# Altium PCB ip_phone_pcb.PcbDoc (part 4 of 4)
Units mil, origin at the board's own origin, x right, y up, seen from the top; angles counter-clockwise.
Board outline 2401.57 x 6885.83 mil, 6 copper layers (Component Side, Ground Plane, Inner Layer 1, Inner Layer 2, Power Plane, Solder Side), stack 60.4 mil thick; 371 components, 298 nets, 1249 pads, 735 vias.
Unrouted connection lines stored in the file: 81.
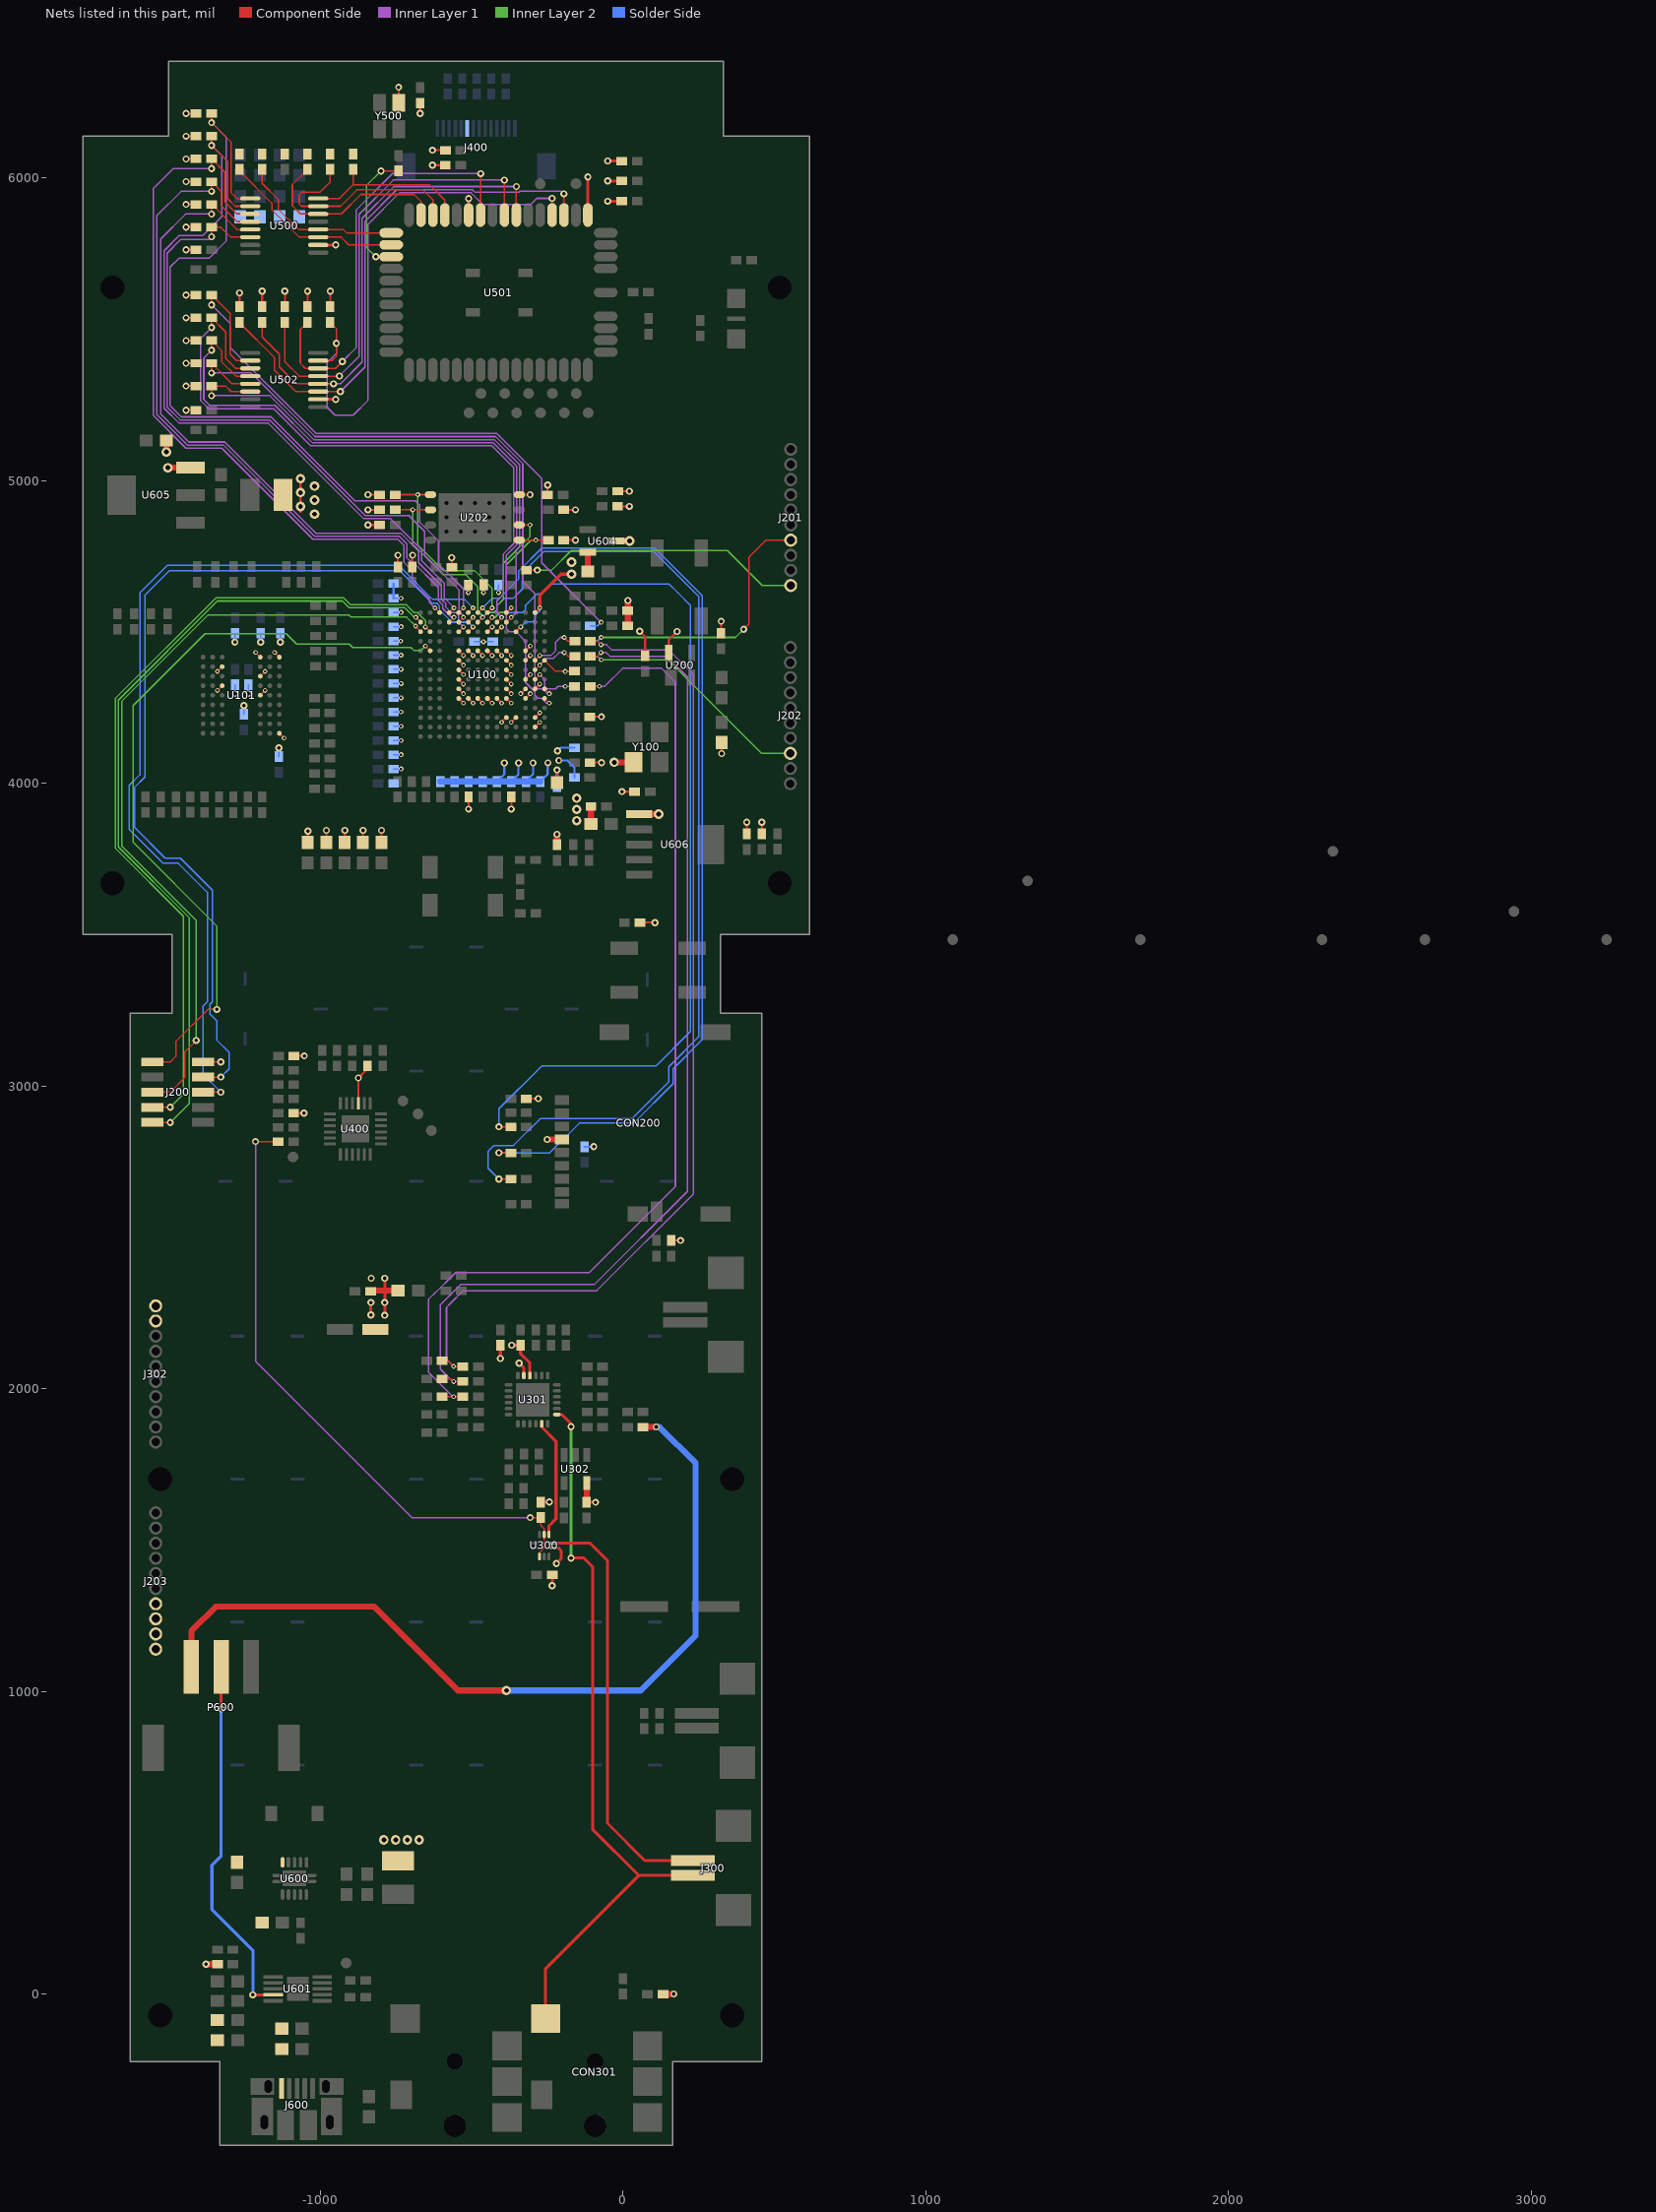
[diagram p8: the nets of this part, all layers, seen from the top]

## Via types
v1: diameter 15.75, hole 7.87, Component Side to Solder Side, tented top, 367 vias
v2: diameter 23.62, hole 11.81, Component Side to Solder Side, 261 vias
v3: diameter 23.62, hole 11.81, Component Side to Solder Side, tented bottom, 44 vias
v4: diameter 31.5, hole 15.75, Component Side to Solder Side, 28 vias
v5: diameter 25.98, hole 12.99, Component Side to Solder Side, tented top, 8 vias
v6: diameter 15.75, hole 7.87, Component Side to Solder Side, 6 vias
v7: diameter 23.62, hole 11.81, Component Side to Solder Side, tented top, 6 vias
v8: diameter 17.72, hole 11.81, Component Side to Solder Side, 5 vias
v9: diameter 19.68, hole 19.68, Component Side to Solder Side, 5 vias
v10: diameter 23.62, hole 11.81, Component Side to Solder Side, tented both sides, 4 vias
v11: diameter 31.5, hole 15.75, Component Side to Solder Side, tented bottom, 1 vias

## Nets (pads, with @x,y where several pads share a name; then routed paths per layer and width w, separated by ;. In a path a pad name is that pad's centre, name@x,y a point inside that pad or via, vN(x,y) a via of type N, cw(c..) or ccw(c..) an arc to the next point about the centre after c; other vN are vias at no path point) (continued)
SDIO1: R511.1 U500.6 U501.15 | length 658.3
  Component Side w5: R511.1@-1041.91,6028.52 -1092.03,5978.39 -1092.03,5908.39 -1065.11,5881.47 U500.6@-1006.91,5881.47 -930.53,5881.47 -866,5946 -690,5946 -667.18,5923.18 U501.15@-667.18,5878
SDIO2: R512.1 U500.7 U501.14 | length 722.3
  Component Side w5: R512.1@-966.91,6028.52 -966.91,5987.52 -1001.03,5953.39 -1061.03,5953.39 -1069.66,5944.76 -1069.66,5915.02 -1061.7,5907.06 U500.7@-1006.91,5907.06 -932.94,5907.06 -879,5961 -661,5961 -627.81,5927.81 U501.14@-627.81,5878
SDIO3: R513.1 U500.8 U501.13 | length 558.2
  Component Side w5: U500.8@-1006.91,5932.65 -936.77,5932.65 -891.91,5977.52 ; R513.1@-891.91,6028.52 -891.91,5977.52 ; U501.13@-588.44,5878 -588.44,5927.44 -638.52,5977.52 -891.91,5977.52
SDIO_0: R505.2 U100.L2 U500.12 | length 2454.7
  Component Side w5: v2(-1359.09,5956.09) R505.2@-1359.09,5988.23 -1327,5956.14 -1327,5908.86 -1274.02,5855.88 U500.12@-1231.31,5855.88 ; U100.L2@-573.99,4532.86 v1(-558.24,4548.61)
  Inner Layer 1 w5: v2(-1359.09,5956.09) -1459.91,5956.09 -1540,5876 -1540,5219 -1439,5118 -1319.79,5118 -1018.79,4817 -739,4817 -714.43,4792.43 -714.43,4746.12 -702.9,4734.59 -696.59,4734.59 -609.74,4647.74 -609.74,4604.49 -595.05,4589.8 -595.05,4577.91 -565.75,4548.61 v1(-558.24,4548.61)
SDIO_1: R504.2 U100.M1 U500.11 | length 2538.6
  Component Side w5: v2(-1359.09,6031.09) R504.2@-1359.09,6063.23 -1316,6020.14 -1316,5922 -1275.47,5881.47 U500.11@-1231.31,5881.47 ; v1(-621.24,4580.1) U100.M1@-605.49,4564.35
  Inner Layer 1 w5: v2(-1359.09,6031.09) -1485.91,6031.09 -1551,5966 -1551,5215 -1444,5108 -1325.65,5108 -1024.65,4807 -744,4807 -724.43,4787.43 -724.43,4731.43 -696.74,4703.74 -696.74,4668.26 -638.85,4610.38 -638.85,4597.72 v1(-621.24,4580.1)
SDIO_2: R503.2 U100.L1 U500.10 | length 2622.8
  Component Side w5: R503.2@-1359.09,6138.23 v2(-1359.09,6108.09) -1306,6055 -1306,5932 -1281.06,5907.06 U500.10@-1231.31,5907.06 ; U100.L1@-573.99,4564.35 v1(-558.24,4580.1)
  Inner Layer 1 w5: v2(-1359.09,6108.09) -1326,6075 -1326,5872 -1387,5811 -1465,5811 -1516,5760 -1516,5239.72 -1466.28,5190 -1171.65,5190 -856.33,4874.68 -767.68,4874.68 -665.05,4772.05 -665.05,4736.05 -589.74,4660.74 -589.74,4612.77 -558.24,4581.28 v1(-558.24,4580.1)
SDIO_3: R502.2 U100.K1 U500.9 | length 2832.1
  Component Side w5: R502.2@-1359.09,6213.23 v2(-1359.09,6183.09) -1294,6118 -1294,5950.98 -1275.67,5932.65 U500.9@-1231.31,5932.65 ; U100.K1@-542.5,4564.35 v1(-526.75,4580.1)
  Inner Layer 1 w5: v2(-1359.09,6183.09) -1310,6134 -1310,5793 -1368,5735 -1467,5735 -1496,5706 -1496,5248 -1459,5211 -1162.65,5211 -885.65,4934 -686,4934 -671,4919 -671,4863 -609,4801 -609,4725 -526.75,4642.75 v1(-526.75,4580.1)
SDIO_CLK: R507.2 U100.K2 U500.14 | length 2233
  Component Side w5: v2(-1359,5806) -1359,5838.14 R507.2@-1359.09,5838.23 -1329.23,5838.23 -1295.7,5804.7 U500.14@-1231.31,5804.7 ; U100.K2@-542.5,4532.86 v1(-526.75,4548.61)
  Inner Layer 1 w5: v2(-1359,5806) -1368,5797 -1461,5797 -1506,5752 -1506,5243.86 -1463.14,5201 -1167.65,5201 -851.33,4884.68 -705.68,4884.68 -704,4883 -704,4881.86 -655.05,4832.91 -655.05,4753.05 -542.12,4640.12 -542.12,4568.37 -526.75,4552.99 v1(-526.75,4548.61)
SDIO_CMD: R506.2 U100.K3 U500.13 | length 2357.2
  Component Side w5: v2(-1359.09,5881.09) R506.2@-1359.09,5913.23 -1276.15,5830.29 U500.13@-1231.31,5830.29 ; U100.K3@-542.5,4501.36 v1(-526.75,4517.11)
  Inner Layer 1 w5: v2(-1359.09,5881.09) -1444.91,5881.09 -1527,5799 -1527,5221 -1434,5128 -1315.65,5128 -1014.65,4827 -734.14,4827 -675.05,4767.91 -675.05,4729.05 -599.74,4653.74 -599.74,4608.63 -585.05,4593.94 -585.05,4582.05 -566.98,4563.98 -551.88,4563.98 -542.87,4554.97 -542.87,4533.23 v1(-526.75,4517.11)
SDIOCLK: R508.1 U500.3 U501.18 | length 619.6
  Component Side w5: R508.1@-1266.91,6028.52 -1266.91,6024.04 -1160.03,5917.16 -1160.03,5895.8 -1068.93,5804.7 U500.3@-1006.91,5804.7 -930.7,5804.7 -905.57,5779.57 U501.18@-765.61,5779.57
SDIOCMD: R509.1 U500.4 U501.17 | length 558.9
  Component Side w5: R509.1@-1191.91,6028.52 -1191.91,5982.27 -1139.03,5929.39 -1139.03,5897.39 -1071.93,5830.29 U500.4@-1006.91,5830.29 -924.29,5830.29 -912.94,5818.94 U501.17@-765.61,5818.94
SFS_CON: R311.1 R323.1 R331.2 | length 3410.7
  Component Side w5: R331.2@-597.45,1973.9 R323.1@-528.95,1973.9 ; R311.1@-108.74,4320.39 v1(-78.08,4320.39)
  Inner Layer 1 w5: -625.47,2311.48 -552.9,2384.06 -286.9,2384.06 ; -617.04,2321.06 -643.04,2295.06 -643.04,2055.06 -561.89,1973.9 v1(-559.61,1973.9) ; -297.04,2384.06 -111.46,2384.06 173.15,2668.67 173.15,4334.68 127.43,4380.39 -1.08,4380.39 -61.08,4320.39 v1(-78.08,4320.39)
SLOW_CLK: R525.1 U501.19 | length 426.1
  Component Side w5: v2(-816.8,5740.2) U501.19@-765.61,5740.2 ; v2(-799.48,6023.52) R525.1@-740.91,6023.52
  Inner Layer 2 w5: v2(-816.8,5740.2) -848,5771.41 -848,5975 v2(-799.48,6023.52)
SPI0_\C\S\_FLASH: R227.1 U100.G1 U202.1 | length 675.1
  Component Side w5: R227.1@-752.74,4953.99 v1(-677.83,4954) U202.1@-635.74,4953.99 ; U100.G1@-448.01,4564.35 v1(-432.26,4580.1)
  Inner Layer 2 w5: v1(-677.83,4954) -677.83,4788.14 -591.87,4702.18 -489.02,4702.18 -432.26,4645.43 v1(-432.26,4580.1)
SPI0_CLK: R231.1 U100.H1 U202.6 | length 3691.4
  Component Side w5: U100.H1@-479.5,4564.35 v1(-463.76,4580.1) ; v2(-409.76,2779.62) R231.1@-370.34,2779.62 ; U202.6@-342.43,4853.99 v1(-306.84,4854)
  Inner Layer 2 w5: v1(-463.76,4580.1) -447.65,4564 -426.62,4564 -416.89,4573.73 -416.89,4586.95 -395.39,4608.45 -395.39,4727.45 -306.84,4815.99 v1(-306.84,4854)
  Solder Side w5: v1(-463.76,4580.1) -432.73,4611.13 -408.84,4611.13 -344.33,4675.64 -344.33,4702.09 -268.59,4777.83 104.67,4777.83 261.97,4620.54 261.97,3153.39 165.82,3057.24 165.82,3008.24 35.12,2877.54 -144.03,2877.54 -241.95,2779.62 v2(-409.76,2779.62)
SPI0_MISO: R225.1 R233.1 U100.H2 U202.2 | length 4020.1
  Component Side w5: R225.1@-752.74,4903.99 U202.2@-635.74,4903.99 ; U100.H2@-479.5,4532.86 v1(-463.76,4548.61) ; v2(-409.76,2692.62) R233.1@-370.34,2692.62
  Inner Layer 2 w5: v1(-694.83,4904) -694.83,4791 -593.83,4690 -519.83,4690 -479.88,4650.04 -479.88,4569.12 -463.76,4552.99 v1(-463.76,4548.61)
  Solder Side w5: v1(-463.76,4548.61) -447.63,4564.73 -425.89,4564.73 -416.89,4573.73 -416.89,4585.72 -391.48,4611.13 -363.55,4611.13 -332.03,4642.65 -332.03,4695.39 -261.03,4766.39 101.97,4766.39 249.97,4618.39 249.97,3162.39 150.97,3063.39 150.97,3014.39 28.97,2892.39 -273.03,2892.39 -361.44,2803.98 -426.44,2803.98 -445.65,2784.77 -445.65,2728.51 v2(-409.76,2692.62)
SPI0_MOSI: R224.1 R234.1 U100.G2 U202.5 | length 3439.6
  Component Side w5: U100.G2@-448.01,4532.86 v1(-432.26,4548.61) ; v2(-409.76,2865.62) R234.1@-370.34,2865.62 ; U202.5@-342.43,4803.99 R224.1@-246.74,4803.99
  Inner Layer 2 w5: v1(-432.26,4548.61) -422.51,4548.61 -406.38,4564.73 -394.4,4564.73 -385.39,4573.73 -385.39,4722.45 -303.83,4804 v1(-287.83,4804.01)
  Solder Side w5: v1(-432.26,4548.61) -422.51,4548.61 -407.13,4563.98 -395.14,4563.98 -394.4,4564.73 -331.4,4564.73 -322.4,4573.73 -322.4,4586.47 -323.18,4587.25 -284.03,4626.39 -270.17,4626.39 -238.17,4658.39 -183.83,4658.39 -183.66,4658.22 -156.11,4658.22 -155.94,4658.39 152.83,4658.39 182.83,4628.39 ; v2(-409.76,2865.62) -409.76,2925.1 -268.47,3066.39 108.97,3066.39 222.97,3180.39 222.97,4588.25 182.83,4628.39 ; 182.97,4628.39 182.83,4628.39
SPK/H\P\: R306.1 R408.1 U300.4 U300.8 | length 2096.3
  Component Side w5: v3(-1213.89,2816.89) R408.1@-1139,2816.89 ; v3(-306.56,1574.44) R306.1@-272.2,1574.44 -272.2,1549.61 -260.2,1537.61 U300.4@-260.2,1518.62 -260.2,1474.33 -275.95,1458.58 U300.8@-275.95,1445.79
  Inner Layer 1 w5: v3@-1213,2816.89 -1213,2090 -697.44,1574.44 v3(-306.56,1574.44)
SPK_OUT: J300.1 U300.2 | length 1405.4
  Component Side w10: U300.2@-231.66,1490.08 -108.66,1490.08 -51.2,1432.62 -51.2,564.62 71.98,441.44 J300.1@230.96,441.44
SPKOUTL: CON301.2 J300.2 U301.19 | length 2448.3
  Component Side w10: CON301.2@-255.61,-80.45 -255.61,84.83 51.6,392.04 51.6,392.23 ; U301.19@-218.32,1914.84 -201.84,1914.84 -171.63,1884.63 v7(-171.63,1874.9) ; v2(-171.63,1440.87) -129.04,1440.87 -100.41,1412.24 -100.41,544.24 51.6,392.23 ; J300.2@230.96,392.23 51.6,392.23
  Inner Layer 2 w10: v2(-171.63,1440.87) v7(-171.63,1874.9)
SPKOUTP: U300.3 U301.17 | length 394.9
  Component Side w10: U301.17@-268.52,1884.33 -268.52,1873.78 -221.2,1826.46 -221.2,1570.62 -244.45,1547.37 U300.3@-244.45,1518.62
SPORT_CLK: R204.2 R312.2 U100.A6 | length 144.9
  Component Side w5: U100.A6@-259.03,4406.87 -222.55,4370.39 R312.2@-159.92,4370.39
  Solder Side w5: v1(-190.58,4369.99) R204.2@-159.92,4369.99
SPORT_FS: R202.2 R311.2 U100.B8 | length 173.7
  Component Side w5: U100.B8@-290.53,4343.88 v1(-274.78,4359.63)
  Inner Layer 1 w5: v1(-274.78,4359.63) -259.03,4343.88 -259.03,4320.44 -251.03,4312.44 -222.59,4312.44 -214.64,4320.39 v1(-190.58,4320.39)
  Solder Side w5: v1(-190.58,4320.39) R202.2@-159.92,4320.39
SPORT_RX: R308.2 U100.B6 | length 186.5
  Component Side w5: U100.B6@-290.53,4406.87 v1(-274.78,4422.62) ; v1(-194.09,4482.39) -182.09,4470.39 R308.2@-159.03,4470.39
  Inner Layer 1 w5: v1@-274.78,4424.92 v1(-274.78,4422.62) -238.4,4422.62 -222.28,4438.74 -222.28,4466.85 -206.74,4482.39 v1(-194.09,4482.39)
SPORT_TX: R309.2 U100.B7 | length 160.1
  Component Side w5: U100.B7@-290.53,4375.38 v1(-274.78,4391.13) ; v1(-194.09,4432.39) -182.09,4420.39 R309.2@-159.03,4420.39
  Inner Layer 1 w5: v1(-274.78,4391.13) -253.28,4412.62 -230.74,4412.62 -210.97,4432.39 v1(-194.09,4432.39)
SRX_CON: R308.1 R321.1 R329.2 | length 3354.9
  Component Side w5: R329.2@-597.45,2092.01 -577.72,2092.01 v1(-559.61,2073.9) R321.1@-528.95,2073.9 ; R308.1@-107.85,4470.39 -84.79,4470.39 v1(-72.79,4458.39)
  Inner Layer 1 w5: v1(-559.61,2073.9) -583.04,2097.33 -583.04,2269.06 -571.05,2281.05 -528.04,2324.06 -86.61,2324.06 233.15,2643.82 233.15,4359.53 152.29,4440.39 -36.19,4440.39 -54.19,4458.39 v1(-72.79,4458.39)
STX_CON: R309.1 R322.1 R330.2 | length 3375.2
  Component Side w5: R330.2@-597.45,2032.95 -568.67,2032.95 v1(-559.61,2023.9) R322.1@-528.95,2023.9 ; R309.1@-107.85,4420.39 -84.79,4420.39 v1(-72.79,4432.39)
  Inner Layer 1 w5: v1(-559.61,2023.9) -561.89,2023.9 -603.04,2065.06 -603.04,2277.34 -536.33,2344.06 -94.9,2344.06 213.15,2652.1 213.15,4351.25 144,4420.39 -43.51,4420.39 -55.51,4432.39 v1(-72.79,4432.39)
TCK: J200.6 U100.P3 | length 2617.4
  Component Side w5: J200.6@-1554.32,2979.89 -1495.54,2979.89 -1447.03,3028.39 -1447.03,3113.39 v2(-1409.53,3150.89) ; v1(-684.78,4519.82) -684.78,4517.66 -684.23,4517.11 U100.P3@-668.48,4501.36
  Inner Layer 2 w5: v2(-1409.53,3150.89) -1409.53,3546.89 -1655.03,3792.39 -1655.03,4272.39 -1370.38,4557.04 -905.68,4557.04 -898.03,4549.39 -714.36,4549.39 v1(-684.78,4519.82)
TDI: J200.10 U100.P2 | length 2741
  Component Side w5: J200.10@-1554.32,2879.89 v2(-1495.54,2879.89) ; v1(-684.23,4548.61) U100.P2@-668.48,4532.86
  Inner Layer 2 w5: v2(-1495.54,2879.89) -1432.03,2943.39 -1432.03,3555.25 -1667.03,3790.25 -1667.03,4275.39 -1339.7,4602.73 -927,4602.73 -904.54,4580.26 -720.27,4580.26 -688.62,4548.61 v1(-684.23,4548.61)
TDO: J200.8 U100.N3 | length 2757.8
  Component Side w5: J200.8@-1554.32,2929.89 v2(-1495.54,2929.89) ; v1(-652.73,4517.11) U100.N3@-636.98,4501.36
  Inner Layer 2 w5: v2(-1495.54,2929.89) -1452.03,2973.39 -1452.03,3561.11 -1677.03,3786.11 -1677.03,4280.65 -1344.28,4613.39 -923.03,4613.39 -899.9,4590.26 -716.13,4590.26 -690.6,4564.73 -678.61,4564.73 -652.73,4538.85 v1(-652.73,4517.11)
TEMP: P600.2 U601.9 | length 1219.7
  Component Side w10: v2(-1327.43,942.43) P600.2@-1327.43,1081 ; v2(-1222.67,-2.33) U601.9@-1155.05,-2.33
  Solder Side w10: v2(-1327.43,942.43) -1327.43,456.57 -1358,426 -1358,280 -1222.67,144.67 v2(-1222.67,-2.33)
TMS: J200.2 U100.N5 | length 2546.6
  Component Side w5: J200.2@-1554.32,3079.89 -1495.54,3079.89 -1477.03,3098.39 -1477.03,3147.39 -1371.03,3253.39 v2(-1342.03,3253.39) ; v1(-652.73,4454.12) U100.N5@-636.98,4438.37
  Inner Layer 2 w5: v2(-1342.03,3253.39) -1342.03,3529.39 -1618.3,3805.67 -1618.3,4257.12 -1381.03,4494.39 -1112.03,4494.39 -1078.03,4460.39 -904.03,4460.39 -893.03,4449.39 -701.25,4449.39 -690.6,4438.74 -668.11,4438.74 v1(-652.73,4454.12)
TXD0: J201.1 R214.1 | length 947.3
  Component Side w5: R214.1@-318.74,4704.99 v2(-282.63,4704.99)
  Inner Layer 2 w5: v2(-282.63,4704.99) -235.43,4704.99 -171.03,4769.39 344.97,4769.39 460.47,4653.89 J201.1@554,4653.89
TXD1: J201.4 R216.1 | length 928.6
  Component Side w5: v2(398.97,4509.39) 415.97,4526.39 415.97,4747.39 472.46,4803.89 J201.4@554,4803.89
  Inner Layer 2 w5: v1(-71.98,4482.39) 371.97,4482.39 v2(398.97,4509.39)
  Solder Side w5: R216.1@-107.85,4470.39 -84.79,4470.39 v1@-72.79,4482.39
TXEN: J202.8 R217.1 | length 793
  Inner Layer 2 w5: v1(-71.98,4408.39) 148.97,4408.39 457.97,4099.39 J202.8@552.97,4099.39
  Solder Side w5: R217.1@-107.85,4420.39 -84.79,4420.39 v1@-72.79,4408.39
UART0_RX: J200.5 U100.J1 | length 3108
  Component Side w5: J200.5@-1387,2979.89 v2(-1328.21,2979.89) ; U100.J1@-511,4564.35 v1(-495.25,4580.1)
  Solder Side w5: v2(-1328.21,2979.89) -1387.03,3038.71 -1387.03,3264.39 -1373.03,3278.39 -1373.03,3640.39 -1469.06,3736.42 -1519.06,3736.42 -1631.03,3848.39 -1631.03,3993.39 -1596.03,4028.39 -1596.03,4629.39 -1505.03,4720.39 -740.89,4720.39 -732.89,4712.39 -628.5,4608 -608.74,4608 -550.96,4608 -523.15,4608 v1(-495.25,4580.1)
UART0_TX: J200.3 U100.J3 | length 3066
  Component Side w5: J200.3@-1387,3029.89 v2(-1328.21,3029.89) ; U100.J3@-511,4501.36 v1(-495.25,4517.11)
  Solder Side w5: v2(-1328.21,3029.89) -1301.03,3057.07 -1301.03,3111.39 -1342.03,3152.39 -1342.03,3216.39 -1364.03,3238.39 -1364.03,3270.39 -1356.06,3278.36 -1356.06,3647.42 -1462.03,3753.39 -1512.03,3753.39 -1614.06,3855.42 -1614.06,3986.36 -1579.06,4021.36 -1579.06,4622.36 -1499.03,4702.39 -737.03,4702.39 -630.11,4595.48 -614.87,4595.48 -605.86,4586.47 -605.86,4573.73 -589.74,4557.61 -564.99,4532.86 -511,4532.86 v1(-495.25,4517.11)
VBAT: C600.2 C605.2 P600.3 R315.1 R602.2 R604.1 U600.5 | length 2817
  Component Side w20: P600.3@-1425.85,1064 -1425.85,1199.15 -1345,1280 -822,1280 -545,1003 v11(-385,1003) ; R315.1@66.23,1873.9 v3(109.9,1873.9)
  Solder Side w20: v11(-385,1003) 58,1003 240,1185 240,1754 120.1,1873.9 v3(109.9,1873.9)
VBUS: C604.2 J600.1 R603.2
VCC1V3: C637.2 C638.2 C639.2 C640.2 C641.2 C642.2 C643.2 C644.2 C645.2 C646.2 C647.2 C648.2 C651.1 R612.1 U100.C9 U100.E7 U100.E8 U100.E9 U100.E10 U100.F3 U100.F10 U100.G3 U100.G10 U100.H10 U100.J10 | length 1169.2
  Component Side w7: U100.J10@-511,4280.89 v1(-495.25,4265.14) ; U100.H10@-479.5,4280.89 v1(-463.76,4265.14) ; U100.G10@-448.01,4280.89 v1(-432.26,4265.14) ; U100.G3@-448.01,4501.36 v1(-432.26,4517.11) ; U100.F10@-416.51,4280.89 v1(-400.76,4265.14) ; U100.F3@-416.51,4501.36 v1(-400.76,4517.11) ; U100.E10@-385.02,4280.89 v1(-369.27,4265.14) ; U100.E9@-385.02,4312.39 v1(-369.27,4296.64) ; U100.E8@-385.02,4343.88 v1(-369.27,4328.13) ; U100.E7@-385.02,4375.38 v1(-369.27,4359.63) ; v1(-337.77,4296.64) U100.C9@-322.02,4312.39 ; C637.2@-218,4004.79 v2@-218,4044.76
  Component Side w20: R612.1@-105.85,3866.39 -105.85,3899 C651.1@-105.85,3924.39
  Solder Side w7: C640.2@-415.85,4006.57 -392.15,4030.28 v2(-392.15,4067.73) ; C643.2@-368.85,4006.39 -345.15,4030.1 v2(-345.15,4067.55) ; C645.2@-320.85,4006.39 -297.15,4030.1 v2(-297.15,4067.55) ; C644.2@-272.74,4006.39 -249.04,4030.1 -249.04,4067.55 -248.59,4068 v2(-247.83,4068) ; v2@-218,4044.47 v2(-217.7,4044.76) ; v2(-216,4108) -206.15,4117.85 C648.2@-160.36,4117.85 ; v2(-212,4076) -183.58,4076 -160.36,4052.78 C647.2@-160.36,4019.85
  Solder Side w10: C646.2@-218,3989.04 v2@-218,4044.47
  Solder Side w20: C639.2@-603.85,4006.57 C638.2@-556.85,4006.57 C641.2@-462.85,4006.57 C640.2@-415.85,4006.57 -272.92,4006.57 C644.2@-272.74,4006.39
  other v4: -152.83,3877 -152.83,3914 -152.83,3951
VCC1V8: C313.1 C500.1 C501.1 C509.2 J302.2 R508.2 R509.2 R510.2 R511.2 R512.2 R513.2 R520.2 R521.2 R522.2 R523.2 R524.2 R611.2 U301.4 U500.2 U501.11 U502.2 Y500.4 | length 867
  Component Side w7: R520.2@-1266.91,5568.8 v2(-1266.91,5621) ; R521.2@-1191.91,5574.7 v2(-1191.91,5626.91) ; R522.2@-1116.91,5574.7 v2(-1116.91,5626.91) ; -1065,4898 v4@-1065,5021 ; R523.2@-1041.91,5574.7 v2(-1041.91,5626.91) ; R524.2@-966.91,5574.7 v2(-966.91,5626.91) ; Y500.4@-741.01,6248 v2(-741.01,6300.2) ; v2(-670,6213.71) C509.2@-670,6247.82 ; v2(-629.57,6043) C501.1@-587,6043 ; v2(-629.16,6092.16) C500.1@-586.59,6092.16
  Component Side w10: U502.2@-1006.91,5269.11 v2(-948.89,5269.11) ; U500.2@-1006.91,5779.11 v2(-948.89,5779.11) ; U501.11@-509.7,5878 v2(-509.7,5931.93) ; v2(-367.2,2143.78) C313.1@-338.2,2143.78 -338.2,2115.62 -307.89,2085.31 U301.4@-307.89,2043.78
  other v4: -1019,4890 -1065,4915 -1019,4936 -1065,4961 -1019,4982 -1065,5007
VCC2V5: C612.2 U100.B1 U100.D3 U604.2 | length 389.8
  Component Side w5: v4(-169.88,4731.46) v4@-169.88,4736.21
  Component Side w7: U100.D3@-353.52,4501.36 v1(-337.77,4517.11) ; U100.B1@-290.53,4564.35 v1(-274.78,4580.1)
  Component Side w10: v1(-274.78,4580.1) -274.78,4621.79 -205.1,4691.47 -179.38,4691.47 v4(-169.88,4691.47)
  Component Side w20: U604.2@-115.85,4760.59 -115.85,4697.46 C612.2@-115.78,4697.39
  Solder Side w5: v1(-337.77,4517.11) -321.65,4533.23 -299.91,4533.23 -290.15,4542.99 -290.15,4554.97 -274.78,4570.35 v1(-274.78,4580.1)
VCC3V3: C100.2 C102.2 C103.2 C104.2 C105.2 C106.2 C107.2 C108.2 C200.2 C201.2 C202.2 C300.2 C303.1 C312.1 C314.2 C315.2 C405.2 C502.1 C503.1 C504.1 C610.1 C611.2 C613.2 C614.2 C615.2 C616.2 C617.2 C618.2 C619.2 C620.2 C621.2 C622.2 C623.2 C624.2 C625.2 C626.2 C627.2 C628.2 C629.2 C630.2 C631.2 C632.2 C633.2 C634.2 C635.2 C649.1 C650.2 C652.2 C653.2 C654.2 C655.2 C656.2 CON200.4 J200.1 J203.1 J203.2 J203.3 J203.4 J302.1 J400.6 L300.1 R133.2 R135.2 R137.2 R146.1 R200.2 R201.2 R206.1 R207.1 R210.2 R211.2 R212.2 R213.2 R219.2 R220.2 R221.2 R223.2 R224.2 R225.2 R226.2 R227.2 R228.2 R229.2 R230.2 R306.2 R310.2 R400.2 R402.2 R501.2 R502.1 R503.1 R504.1 R505.1 R506.1 R507.1 R514.2 R515.2 R516.2 R517.2 R518.2 R519.2 R601.2 R607.1 R614.1 U100.B9 U100.B12 U100.B13 U100.C5 U100.C6 U100.C8 U100.C10 U100.D12 U100.E1 U100.E5 U100.E6 U100.E12 U100.F5 U100.G5 U100.H5 U100.J2 U100.J5 U100.K5 U100.K6 U100.K7 U100.K8 U100.K9 U100.K10 U101.A7 U101.A9 U101.B3 U101.C7 U101.D3 U101.E7 U101.J9 U200.4 U202.8 U300.1 U301.5 U302.5 U400.21 U501.1 U604.3 U605.3 U606.1 Y100.4 | length 4814.8
  Component Side w5: J200.1@-1387,3079.89 v2(-1328.21,3079.89) ; v1(-1339.79,4307.12) U101.D3@-1324.04,4322.87 ; v1(-1339.79,4370.11) U101.B3@-1324.04,4385.86 ; v1(-1213.8,4433.1) U101.A7@-1198.06,4417.35 ; U101.E7@-1198.06,4291.37 v1(-1182.31,4307.12) ; U101.C7@-1198.06,4354.36 v1(-1182.31,4370.11) ; v1(-1150.81,4433.1) U101.A9@-1135.06,4417.35 ; U101.J9@-1135.06,4165.39 v1(-1119.32,4149.64) ; v1(-511,4630.71) C623.2@-511,4655.71 ; v1(-460.63,4630.98) C624.2@-460.63,4655.98
  Component Side w7: v2(-1443.23,5233.23) R514.2@-1410.27,5233.23 ; v2(-1443.23,5313.23) R519.2@-1410.27,5313.23 ; v2(-1443.23,5388.23) R518.2@-1410.27,5388.23 ; v2(-1443.23,5463.23) R517.2@-1410.27,5463.23 ; v2(-1443.23,5538.23) R516.2@-1410.27,5538.23 ; v2(-1443.23,5613.23) R515.2@-1410.27,5613.23 ; v2(-1443.23,5763.23) R501.2@-1410.27,5763.23 ; v2(-1443.23,5838.23) R507.1@-1410.27,5838.23 ; v2(-1443.23,5913.23) R506.1@-1410.27,5913.23 ; v2(-1443.23,5988.23) R505.1@-1410.27,5988.23 ; v2(-1443.23,6063.23) R504.1@-1410.27,6063.23 ; v2(-1443.23,6138.23) R503.1@-1410.27,6138.23 ; v2(-1443.23,6213.23) R502.1@-1410.27,6213.23 ; R400.2@-1087.82,2910.71 v2(-1053.71,2910.71) ; R402.2@-1086.82,3099.89 v2(-1052.71,3099.89) ; C613.2@-1041,3802.85 C613.2@-1041,3804.82 v2@-1041,3842.83 ; C614.2@-980,3804.82 v2@-980,3844.8 ; C626.2@-919,3804.82 v2@-919,3844.8 ; U400.21@-874.43,2943.4 -874.43,3026.57 v2(-874,3027) -844.12,3056.88 C405.2@-844.12,3066.71 ; C625.2@-859,3804.82 v2@-859,3844.8 ; v2(-842.65,4853.99) R226.2@-803.92,4853.99 ; v2(-842.65,4903.99) R225.2@-803.92,4903.99 ; v2(-842.65,4953.99) R227.2@-803.92,4953.99 ; C652.2@-798,3804.82 v2@-798,3844.8 ; R220.2@-743.74,4715.17 v2(-743.74,4753.91) ; R219.2@-696.74,4715.17 -696.74,4753.91 -696.65,4754 v2(-695,4754) ; R221.2@-565.56,4713.99 v2(-565.56,4745.89) ; U100.K10@-542.5,4280.89 v1(-526.75,4265.14) ; U100.K9@-542.5,4312.39 v1(-526.75,4296.64) ; U100.K8@-542.5,4343.88 v1(-526.75,4328.13) ; U100.K7@-542.5,4375.38 v1(-526.75,4359.63) ; U100.K6@-542.5,4406.87 v1(-526.75,4391.13) ; U100.K5@-542.5,4438.37 v1(-526.75,4422.62) ; U100.J5@-511,4438.37 v1(-495.25,4422.62) ; U100.J2@-511,4532.86 v1(-495.25,4548.61) ; v2@-509.85,3915.24 R133.2@-509.85,3955.21 ; U100.H5@-479.5,4438.37 v1(-463.76,4422.62) ; U100.G5@-448.01,4438.37 v1(-432.26,4422.62) ; U100.F5@-416.51,4438.37 v1(-400.76,4422.62) ; v1(-400.76,4202.15) U100.E12@-385.02,4217.9 ; U100.E6@-385.02,4406.87 v1(-369.27,4391.13) ; U100.E5@-385.02,4438.37 v1(-369.27,4422.62) ; U100.E1@-385.02,4564.35 v1(-369.27,4580.1) ; v1(-369.27,4202.15) U100.D12@-353.52,4217.9 ; v2@-368.85,3915.24 R135.2@-368.85,3955.21 ; U202.8@-342.43,4953.99 v2(-306.83,4953.99) ; U100.C10@-322.02,4280.89 v1(-306.28,4296.64) ; U100.C8@-322.02,4343.88 v1(-306.28,4359.63) ; U100.C6@-322.02,4406.87 v1(-306.28,4422.62) ; U100.C5@-322.02,4438.37 v1(-306.28,4454.12) ; R229.2@-319.16,2958.62 v2(-279.73,2958.62) ; U100.B13@-290.53,4186.4 v1(-274.78,4202.15) ; U100.B12@-290.53,4217.9 v1(-274.78,4233.65) ; U100.B9@-290.53,4312.39 v1(-274.78,4328.13) ; C201.2@-249.18,4953.89 v2(-249.18,4985.65) ; R224.2@-195.56,4803.99 v2(-156.83,4803.99) ; R228.2@-195.56,4903.99 v2(-156.83,4903.99) ; R146.1@-109.18,4220.39 v2(-70.98,4220.39) ; R137.2@-109,4068.85 v2(-70.8,4068.85) ; C610.1@-17.85,4915.39 v2(20.88,4915.39) ; C611.2@-17.67,4965.39 v2(21.06,4965.39) ; v2@-3.49,3972.85 C100.2@36.49,3972.85 ; v2(55.17,4503) 73.15,4485.02 C200.2@73.15,4421.57 ; R223.2@56.15,3540.39 v2(105.97,3540.39) ; U200.4@151.28,4431.1 151.28,4474.11 v2(179.17,4502) ; R230.2@159.16,2489.98 v2(189.97,2489.98) ; R201.2@324.32,4496.42 v2(324.32,4535.84) ; v2(326,4098.58) R200.2@326,4134.96 ; C649.1@408.97,3833.21 v2(408.97,3871.41) ; C650.2@458.97,3833.39 v2(458.97,3871.59)
  Component Side w10: v3(-832.85,2244.15) v2(-832.85,2285.1) ; v3(-786.85,2242.85) v2(-786.85,2285.1) -786.85,2324.39 v2(-786.85,2365.1) ; v2(-405,2100.12) C312.1@-405,2143.78 ; v7(-343,2085) -327.57,2069.57 U301.5@-327.57,2043.78 ; R306.2@-272.2,1625.62 v2(-243.2,1625.62) ; v3(-233.82,1349.82) C314.2@-233.82,1386 ; U300.1@-231.66,1474.33 -213.33,1474.33 -204,1465 -204,1439 v2(-220,1423) ; C315.2@-119.64,1624.9 v2(-90.64,1624.9) ; U501.1@-116,5878 v2(-116,6004) ; v2(-50.15,5923.52) C504.1@-3.91,5923.52 ; v2(-50.15,5990.52) C503.1@-3.91,5990.52 ; v2(-50.15,6056.52) C502.1@-3.91,6056.52
  Component Side w20: v4(-1508.07,5095.07) C635.2@-1508.07,5132.89 ; v4(-1503.34,5042.99) U605.3@-1427.96,5042.99 ; v2(-1377.57,98.98) R607.1@-1339.63,98.98 ; C300.2@-831.56,2324.39 -786.85,2324.39 L300.1@-742.85,2324.39 ; v2(-250.28,2823.76) CON200.4@-201.83,2823.76 ; R614.1@-217.85,3797.39 v2(-217.85,3831.98) ; C315.2@-119.64,1624.9 U302.5@-119.64,1688.13 ; v4(-28.99,4069.85) Y100.4@35.02,4069.85 ; U604.3@-21.63,4801.08 v4(22.04,4801.08) ; R207.1@15.15,4520.39 16.15,4521.39 v2(16.15,4604.39) ; U606.1@54.15,3898.39 v4(118.17,3898.39) ; R310.2@132.18,0 167.39,0 v2(167.99,0.59)
  Solder Side w5: v2(-1282.03,4297.17) C107.2@-1282.03,4326.17 ; v2(-1282.03,4467.17) C105.2@-1282.03,4496.17 ; C106.2@-1252.03,4228.54 v2(-1252.03,4257.54) ; v2(-1237.03,4297.17) C108.2@-1237.03,4326.17 ; v2(-1197.03,4467.17) C103.2@-1197.03,4496.17 ; C104.2@-1137.03,4088.54 v2(-1137.03,4117.54) ; v2(-1132.03,4467.17) C102.2@-1132.03,4496.17 ; C654.2@-757.82,4047.89 v1(-732.82,4047.89) ; C655.2@-757.82,4094.89 v1(-732.82,4094.89) ; C632.2@-757.82,4141.89 v1(-732.82,4141.89) ; C618.2@-757.82,4188.89 v1(-732.82,4188.89) ; C656.2@-757.82,4235.89 v1(-732.82,4235.89) ; C634.2@-757.82,4282.89 v1(-732.82,4282.89) ; C633.2@-757.82,4329.89 v1(-732.82,4329.89) ; C627.2@-757.82,4376.89 v1(-732.82,4376.89) ; C628.2@-757.82,4423.89 v1(-732.82,4423.89) ; C617.2@-757.82,4470.89 -732.82,4470.89 -733.47,4470.24 v1(-734.15,4470.24) ; C620.2@-757.82,4517.89 v1(-732.82,4517.89) ; C619.2@-757.82,4564.89 v1(-732.82,4564.89) ; C621.2@-757.82,4611.89 v1(-732.82,4611.89) ; v1(-511,4630.71) C653.2@-511,4655.71 ; C616.2@-490.82,4468 C615.2@-430.18,4468 ; v1(-460.63,4630.98) C629.2@-460.63,4655.98 ; v1(-411,4630.71) C630.2@-411,4655.71
  Solder Side w7: C621.2@-757.82,4611.89 C622.2@-757.82,4659.89 ; C202.2@-127.34,2799.8 v2(-96.53,2799.8)
  other v1: -461,4468
  other v2: -831.85,2365.1 -1040.7,3842.83 -979.7,3844.8 -918.7,3844.8 -858.7,3844.8 -797.7,3844.8 -510.15,3915.24 -369.15,3915.24 -3.49,3973.15
  other v4: -712.04,509.37 -673.04,509.37 -790.04,509.77 -751.04,509.77
WIFI_CS: R516.1 U100.F2 U502.11 | length 2210.5
  Component Side w5: v2(-1359.09,5506.09) R516.1@-1359.09,5538.23 -1312.03,5491.17 -1312.03,5404.39 -1279.11,5371.47 U502.11@-1231.31,5371.47 ; U100.F2@-416.51,4532.86 v1(-400.76,4548.61)
  Inner Layer 1 w5: v2(-1359.09,5506.09) -1394.68,5470.5 -1394.68,5264.54 -1372,5241.86 -1372,5238 -1154,5238 -1032,5116 -433.14,5116 -361,5043.86 -361,4792.14 -395.63,4757.52 -395.63,4624.34 -416.51,4603.45 -416.51,4564.35 v1(-400.76,4548.61)
WIFI_INT: R218.1 R515.1 U502.10 | length 2299.3
  Component Side w5: v2(-1359.09,5581.09) R515.1@-1359.09,5613.23 -1298.03,5552.17 -1298.03,5418.39 -1276.7,5397.06 U502.10@-1231.31,5397.06
  Inner Layer 1 w5: v2(-1359.09,5581.09) -1298.03,5520.03 -1298.03,5440.6 -1013.43,5156 -416.57,5156 -268.49,5007.92 -268.49,4728.91 v1(-71.98,4532.39)
  Solder Side w5: R218.1@-107.85,4520.39 -84.79,4520.39 v1@-72.79,4532.39
WIFICS: R523.1 U501.10 U502.6 | length 1417.7
  Component Side w5: R523.1@-1041.91,5523.52 -1066.03,5499.39 -1066.03,5388.39 -1049.11,5371.47 U502.6@-1006.91,5371.47 -949.53,5371.47 v2(-927,5394) ; U501.10@-470.33,5878 v2(-470.33,6014.67)
  Inner Layer 1 w5: v2(-927,5394) -882,5439 -882,5894 -761,6015 -470.66,6015 v2(-470.33,6014.67)
WIFIINT: R524.1 U501.4 U502.7 | length 1887.7
  Component Side w5: U502.7@-1006.91,5397.06 -961.36,5397.06 -947.03,5411.39 v2(-947.03,5454) -947.03,5503.65 R524.1@-966.91,5523.52 ; U501.4@-234.11,5878 v2(-234.11,5933)
  Inner Layer 1 w5: v2(-947.03,5454) -947.03,5419.97 -977,5390 -977,5243 -951,5217 -891,5217 -842,5266 -842,5848 -738.76,5951.24 -557.07,5951.24 -501.7,5951.24 -463.08,5912.62 -304.85,5912.62 -284.47,5933 v2(-234.11,5933)
WL_DBG: R519.1 U100.E2 U502.14 | length 1818
  Component Side w5: v2(-1359.09,5281.09) R519.1@-1359.09,5313.23 -1312.87,5313.23 -1294.34,5294.7 U502.14@-1231.31,5294.7 ; U100.E2@-385.02,4532.86 v1(-369.27,4548.61)
  Inner Layer 1 w5: v2(-1359.09,5281.09) -1166.8,5281.09 -1021.72,5136 -424.86,5136 -341,5052.14 -341,4783.86 -353.15,4771.71 -353.15,4573.73 -353.15,4564.73 v1(-369.27,4548.61)
WL_RX: R517.1 U100.A10 U502.12 | length 2431.8
  Component Side w5: v2(-1359.09,5431.09) R517.1@-1359.09,5463.23 -1326.03,5430.17 -1326.03,5393.39 -1278.52,5345.88 U502.12@-1231.31,5345.88 ; U100.A10@-259.03,4280.89 v1(-243.28,4265.14)
  Inner Layer 1 w5: v2(-1359.09,5431.09) -1384.68,5405.5 -1384.68,5268.68 -1365,5249 -1149.86,5249 -1026.86,5126 -429,5126 -351,5048 -351,4788 -385.3,4753.7 -385.3,4511.4 -375.64,4501.74 -353.89,4501.74 -321.65,4469.49 -321.65,4333.75 -300.66,4312.76 -290.9,4303.01 -290.9,4291.02 -281.15,4281.26 -269.16,4281.26 -253.04,4265.14 v1(-243.28,4265.14)
WL_TX: R518.1 U100.A9 U502.13 | length 2171.3
  Component Side w5: v2(-1359.09,5356.09) R518.1@-1359.09,5388.23 -1291.15,5320.29 U502.13@-1231.31,5320.29 ; U100.A9@-259.03,4312.39 v1(-243.28,4296.64)
  Inner Layer 1 w5: v2(-1359.09,5356.09) -1227.66,5356.09 -1017.57,5146 -420.72,5146 -331,5056.28 -331,4666.97 -290.53,4626.5 -290.53,4322.14 -281.15,4312.76 -265.49,4312.76 -249.37,4296.64 v1(-243.28,4296.64)
WLDBG: R520.1 U501.3 U502.3 | length 1828.8
  Component Side w5: R520.1@-1266.91,5523.52 -1266.91,5522.27 -1152.03,5407.39 -1152.03,5366.01 -1080.73,5294.7 U502.3@-1006.91,5294.7 v2(-933.3,5294.7) ; U501.3@-194.74,5878 v2(-194.74,5948)
  Inner Layer 1 w5: v2(-933.3,5294.7) -852,5376 -852,5857 -747.76,5961.24 -561.21,5961.24 -497.56,5961.24 -489.01,5952.69 -344.22,5952.69 -339.91,5957 -203.74,5957 v2(-194.74,5948)
WLRX: R522.1 U501.8 U502.5 | length 1533.6
  Component Side w5: R522.1@-1116.91,5523.52 -1116.91,5393.27 -1069.52,5345.88 U502.5@-1006.91,5345.88 v2(-937.12,5345.88) ; U501.8@-391.59,5878 v2(-391.59,5993.41)
  Inner Layer 1 w5: v2(-937.12,5345.88) -872,5411 -872,5880 -758.59,5993.41 v2(-391.59,5993.41)
WLTX: R521.1 U501.7 U502.4 | length 1618.9
  Component Side w5: R521.1@-1191.91,5523.52 -1191.91,5475.27 -1135.03,5418.39 -1135.03,5376.39 -1078.93,5320.29 U502.4@-1006.91,5320.29 v2(-956.29,5320.29) ; U501.7@-352.22,5878 v2(-352.22,5972)
  Inner Layer 1 w5: v2(-956.29,5320.29) -933.71,5320.29 -862,5392 -862,5867 -757,5972 v2(-352.22,5972)
pads on no net: ANT500.ANT CON200. CON200.1 CON200.8 CON300. CON301. CON301.4 J201.7 J203.5 J203.6 J300. J301. J400. J400.3 J400.13 J400.14 J600.2 J600.3 J600.4 M300. P600. U100.C14 U101.E2 U202.9 U300.10 U501.9 U501.20 U501.21 U501.22 U501.23 U501.25 U501.28 U501.31 U501.32 U502.8 U502.9 U601.6 U605.4 X100.2 X100.3 Y100.1 Y500.1
copper on no net:
  other v3: -990,2675

## Polygon pours and split planes (outlines as drawn)
VBAT on Component Side "Bottom Layer-No Net" (solid, remove dead copper, pour order 1002): -1606,-202 -1606,1209 -1372,1209 -1372,683 -1231,683 -1231,453 -1115,453 -1115,-202
VCC1V8 on Component Side "Bottom Layer-No Net" (solid, remove dead copper): -1178,5030 -1178,4859 -989,4859 -989,5030 -1178,5030
VCC3V3 on Component Side "Bottom Layer-No Net" (solid, remove dead copper): -862,2410 -862,2164 -712,2164 -712,2410
AVCC3V3 on Component Side "Bottom Layer-No Net" (solid, remove dead copper): -702,1835 14,1835 14,2410 -702,2410
AGND on Component Side "Bottom Layer-No Net" (solid, remove dead copper): 40.82,902.9 40.82,827.9 341,827.9 341,902.9
VCC1V3 on Component Side "Component Side-No Net" (solid, pour order 22): -77.83,3850 -92.83,3835 -143.83,3835 -181.83,3873 -181.83,3960 -154.83,3987 -101.83,3987 -77.83,3963
NetL600_2 on Component Side "Top Layer-No Net" (solid, remove dead copper, pour order 27): -1085.28,682.17 -1085.28,412.18 -942.83,412.18 -942.83,682.24
NetL600_1 on Component Side "Top Layer-No Net" (solid, remove dead copper, pour order 26): -1079.86,682.17 -1079.86,412.18 -1222.3,412.18 -1222.3,682.24
NetC603_2 on Component Side "Top Layer-No Net" (solid, remove dead copper, pour order 25): -1065.59,351.75 -1154.66,351.75 -1154.66,198.78 -1154.66,198.39 -1029.81,198.39 -1022.28,198.39 -1022.28,351.6
AGND on Component Side "Top Layer-No Net" (solid, remove dead copper, pour order 24): -815.58,545.4 -815.58,369.55 -818.69,369.55 -939.49,369.55 -939.49,545.39 -942.83,545.39
NetR600_2 on Component Side "Top Layer-No Net" (solid, remove dead copper, pour order 23): -1304.63,4.38 -1304.63,-111.42 -1305.23,-112.02 -1186.44,-112.03 -1186.44,-43.71 -1169.98,-43.67 -1116.87,-43.67 -1116.87,3.98
VBUS on Component Side "Top Layer-No Net" (solid, remove dead copper, pour order 21): -1186.44,-43.71 -1190.99,-43.71 -1190.99,-367.49 -1086.08,-367.49 -1086.08,-43.67
VCC2V5 on Component Side "Component Side-No Net" (solid, remove dead copper, pour order 33): -85.04,4781.23 -85.04,4666.14 -85.03,4666.13 -220.26,4666.13 -220.57,4665.82 -220.57,4753.48 -171,4753.48 -171,4781.27
VCC3V3 on Component Side "Bottom Layer-No Net" (solid, remove dead copper, pour order 1000): -815,545 -815,395 -649,395 -648,396 -648,545 -815,545
NetC601_2 on Component Side "Top Layer-No Net" (solid, remove dead copper, pour order 28): -1056.8,453 -1056.8,274.66 -654.57,274.66 -654.57,381.77 -942.83,381.77 -942.83,453
AGND on Component Side "Bottom Layer-No Net" (solid, remove dead copper, pour order 1001): -1285,1175 -1285,946 -1269,930 -1268,929 -1175,929 -1167,929 -1153,943 -1153,1177 -1165,1189 -1168,1192 -1253,1192 -1268,1192 -1285,1175
AGND on Ground Plane (split plane): 161 vertices, not listed, extent -1764.66,-479.01 596.72,6366.62
VCC3V3 on Power Plane (split plane): 312.27,6138.69 312.66,6134.76 313.8,6130.99 315.66,6127.52 318.16,6124.47 321.2,6121.98 324.68,6120.12 328.45,6118.97 332.37,6118.59 596.72,6118.59 596.72,3520.99 321.54,3520.99 317.62,3520.6 313.85,3519.46 310.38,3517.6 307.33,3515.1 304.83,3512.05 302.98,3508.58 301.83,3504.81 301.45,3500.89 301.45,3241.05 301.83,3237.13 302.98,3233.36 304.83,3229.88 307.33,3226.84 310.38,3224.34 313.85,3222.48 317.62,3221.34 321.54,3220.95 439.24,3220.95 439.24,-203.42 164.06,-203.42 160.14,-203.81 156.37,-204.95 152.9,-206.81 149.85,-209.31 147.35,-212.35 145.5,-215.83 144.35,-219.6 143.97,-223.52 143.97,-479.01 -1311.9,-479.01 -1311.9,-223.52 -1312.29,-219.6 -1313.43,-215.83 -1315.29,-212.35 -1317.79,-209.31 -1320.83,-206.81 -1324.31,-204.95 -1328.08,-203.81 -1332,-203.42 -1607.18,-203.42 -1607.18,3220.95 -1489.48,3220.95 -1485.56,3221.34 -1481.79,3222.48 -1478.32,3224.34 -1475.27,3226.84 -1472.77,3229.88 -1470.91,3233.36 -1469.77,3237.13 -1469.38,3241.05 -1469.38,3500.89 -1469.77,3504.81 -1470.91,3508.58 -1472.77,3512.05 -1475.27,3515.1 -1478.32,3517.6 -1481.79,3519.46 -1485.56,3520.6 -1489.48,3520.99 -1764.66,3520.99 -1764.66,6118.59 -1500.31,6118.59 -1496.39,6118.97 -1492.62,6120.12 -1489.14,6121.98 -1486.1,6124.47 -1483.6,6127.52 -1481.74,6130.99 -1480.6,6134.76 -1480.21,6138.69 -1480.21,6366.62 312.27,6366.62
VCC1V3 on Power Plane (split plane): -326.1,4474.89 -326.1,4228 -325.71,4226.05 -324.6,4224.4 -283.6,4183.4 -281.95,4182.29 -280,4181.9 -247.11,4181.9 -190.1,4124.89 -190.1,4045 -189.71,4043.05 -188.6,4041.4 -131.1,3983.89 -131.1,3943 -131.1,3867.11 -140.11,3858.1 -219.89,3858.1 -404.9,4043.11 -404.9,4074.89 -347.4,4132.4 -346.29,4134.05 -345.9,4136 -345.9,4147 -345.9,4205 -346.29,4206.95 -347.4,4208.6 -363.4,4224.6 -365.05,4225.71 -367,4226.1 -474.89,4226.1 -503.9,4255.11 -503.9,4331.89 -468.89,4366.9 -372,4366.9 -370.05,4367.29 -368.4,4368.4 -350.4,4386.4 -349.29,4388.05 -348.9,4390 -348.9,4433 -349.29,4434.95 -350.4,4436.6 -353.4,4439.6 -360.4,4446.6 -362.05,4447.71 -364,4448.1 -405.89,4448.1 -417.4,4459.6 -450.9,4493.11 -450.9,4510.89 -435.89,4525.9 -377.11,4525.9

## Keep-outs
Keep-Out Layer:
  the board outline again, w10

## Other copper
Ground Plane (plane layer: these items are gaps in the copper):
  lines w30: -792.85,-499.11 -792.85,51.39 -641.85,202.39 -641.85,1904.83 -710.02,1973 -710.02,2363 -630.02,2443 -142.02,2443 ; 115.98,2392 458.34,2392 459.34,2393
Power Plane (plane layer: these items are gaps in the copper):
  lines w10: -509,4253 -477,4221 -367,4221 -351,4205 -351,4147 -351,4136 -410,4077 -410,4041 -222,3853 -138,3853 -126,3865 -126,3943 -126,3986 -185,4045 -185,4127 -245,4187 -280,4187 -321,4228 -321,4477 -375,4531 -438,4531 -456,4513 -456,4491 -421,4456 -408,4443 -364,4443 -357,4436 -354,4433 -354,4390 -372,4372 -382,4372 -471,4372 -509,4334 -509,4253

## Text inside footprints (layer, text, board x,y; h text height)
BID200: Bottom Overlay "NOV / 2011" at 222.76,8.46 h118.11 r270; Bottom Overlay "UFC - DETI" at 345.66,-7.14 h118.11 r270